# EAGLE board Main_DMB-4773 (EAGLE 6.5.0)
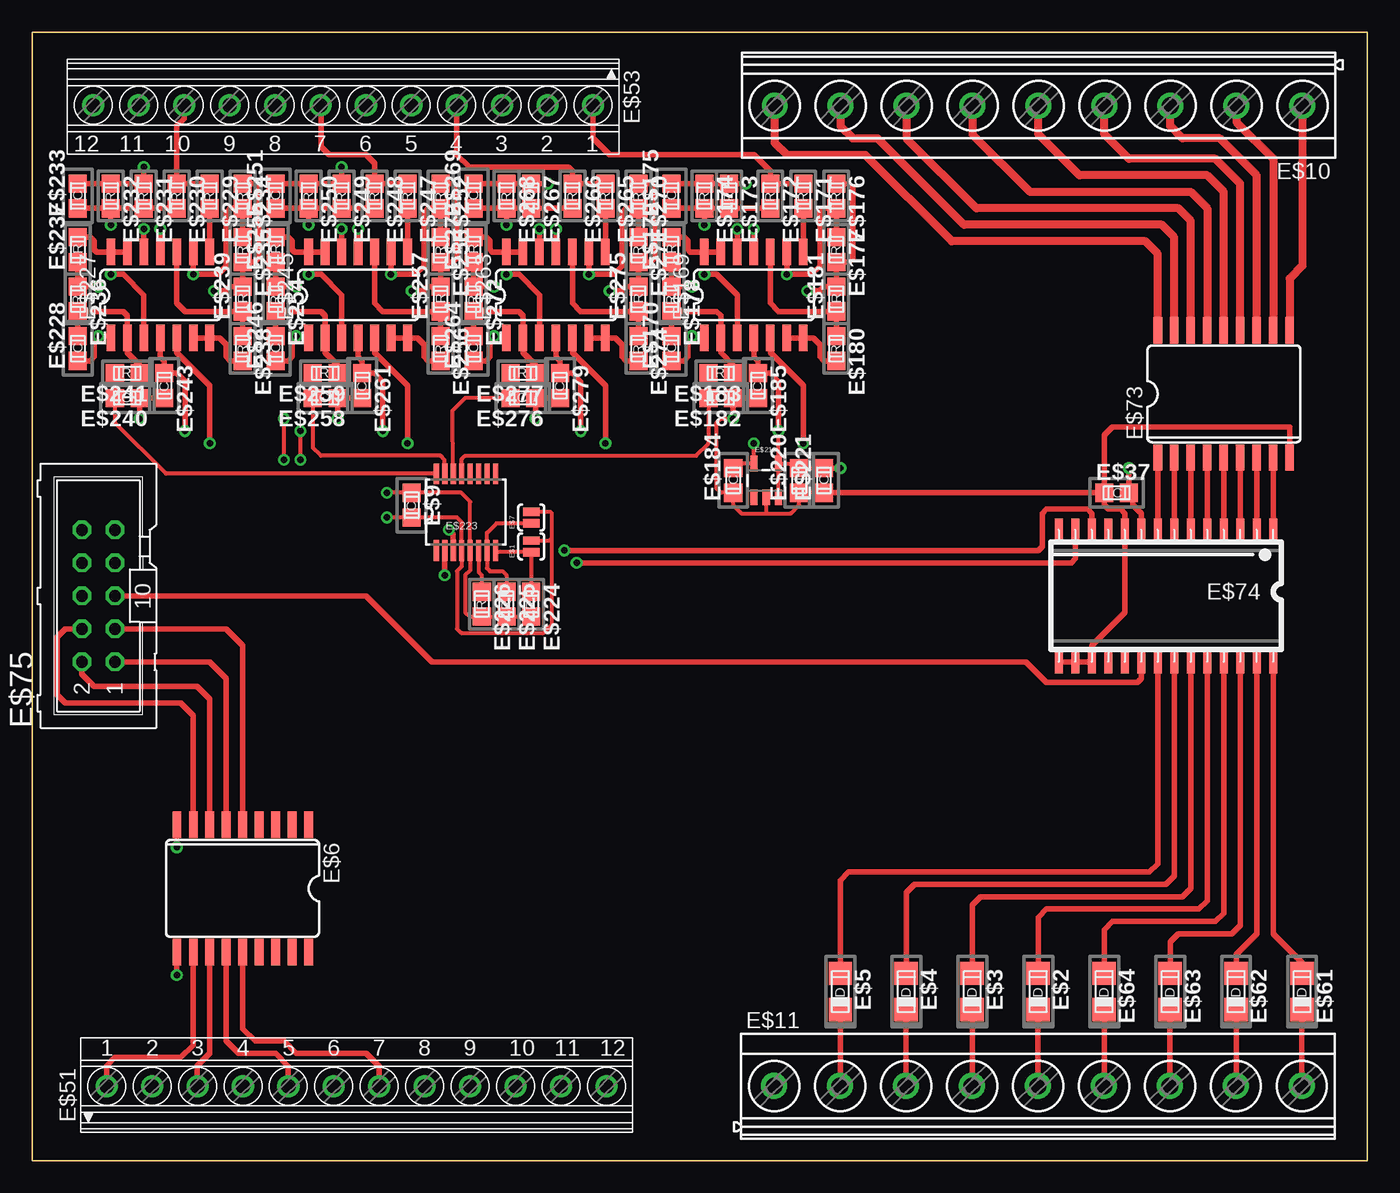
[diagram p0: board, top side]
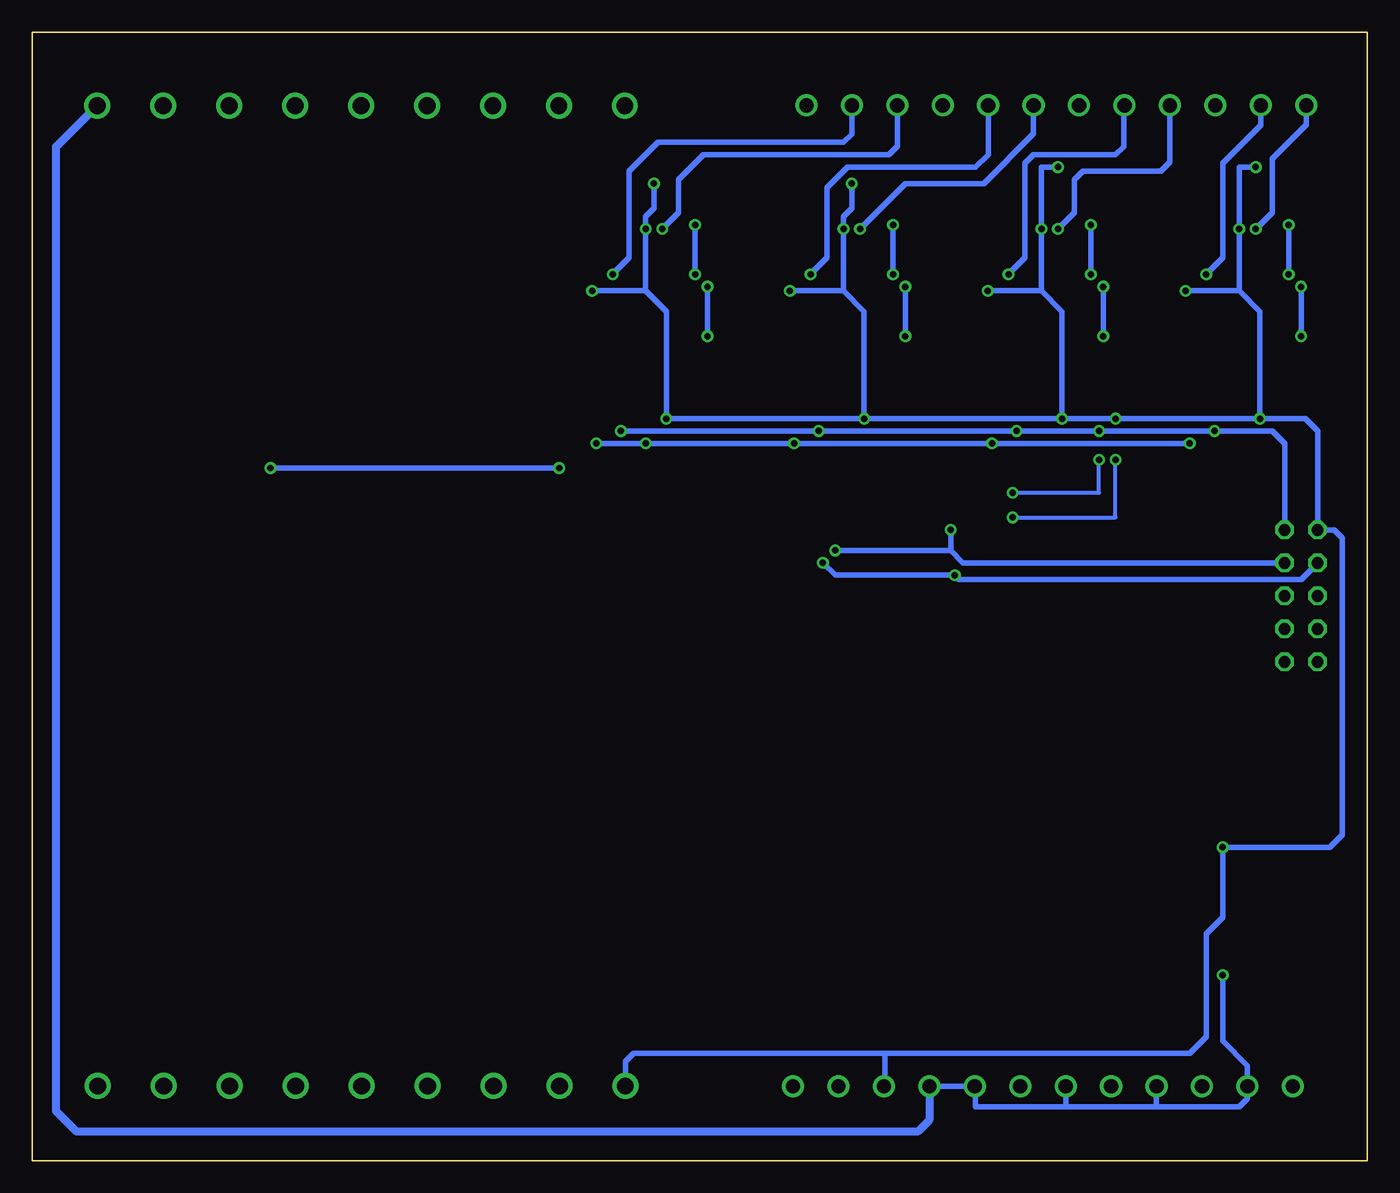
[diagram p1: board, bottom side, seen from below]

Size 102.79 x 86.89 mm. Coordinates in mm from the lower left corner, seen from the top.
Outline: 0,86.89 102.79,86.89 102.79,0 0,0 0,86.89
Copper layers (1*16): Top 0.035mm / dielectric 1.5mm / Bottom 0.035mm
Design rules "default *": minimum track width 10mil, minimum drill 24mil, track to track 7mil, track to pad 7mil, pad to pad 7mil, via to via 7mil, smd to smd 7mil, copper to edge 40mil, drill to drill 8mil, minimum pad ring 10mil, minimum via ring 8mil, stop-mask expansion 4mil, vias tented up to drill 0mil, thermal gap 10mil

## Footprints (pad centres in the part's own frame; a part is rotated, then mirrored left to right if it is on the bottom)
SJ_2S-NO = smd 0.635 x 1.27: 1 -0.45,0; 2 0.45,0
DMINIMELF = smd 1.8 x 1.8: A -1.4,0; C 1.4,0
SO18L = smd 0.66 x 2.032: 1 -0.635,-4.902; 2 0.635,-4.902; 3 1.905,-4.902; 4 3.175,-4.902; 5 4.445,-4.902; 6 5.715,-4.902; 7 6.985,-4.902; 8 8.255,-4.902; 9 9.525,-4.902; 10 9.525,4.902; 11 8.255,4.902; 12 6.985,4.902; 13 5.715,4.902; 14 4.445,4.902; 15 3.175,4.902; 16 1.905,4.902; 17 0.635,4.902; 18 -0.635,4.902
C0805 = smd 1.397 x 1.397: 1 -0.953,0; 2 0.953,0
MKDSN1,5/9-5,08 = drill 1.3 pad 2: 1 -20.341,0.025; 2 -15.261,0.025; 3 -10.181,0.025; 4 -5.101,0.025; 5 -0.021,0.025; 6 5.059,0.025; 7 10.139,0.025; 8 15.219,0.025; 9 20.299,0.025
175317 = drill 1.1 pad 1.7: 1 -13.973,0; 2 -10.473,0; 3 -6.973,0; 4 -3.473,0; 5 0.028,0; 6 3.527,0; 7 7.027,0; 8 10.527,0; 9 14.027,0; 19 17.527,0; 20 21.027,0; 21 24.527,0
SO28 = smd 0.635 x 1.778: 1 -8.255,-5.08; 2 -6.985,-5.08; 3 -5.715,-5.08; 4 -4.445,-5.08; 5 -3.175,-5.08; 6 -1.905,-5.08; 7 -0.635,-5.08; 8 0.635,-5.08; 9 1.905,-5.08; 10 3.175,-5.08; 11 4.445,-5.08; 12 5.715,-5.08; 13 6.985,-5.08; 14 8.255,-5.08; 15 8.255,5.08; 16 6.985,5.08; 17 5.715,5.08; 18 4.445,5.08; 19 3.175,5.08; 20 1.905,5.08; 21 0.635,5.08; 22 -0.635,5.08; 23 -1.905,5.08; 24 -3.175,5.08; 25 -4.445,5.08; 26 -5.715,5.08; 27 -6.985,5.08; 28 -8.255,5.08
ML10 = drill 0.914 octagon: 1 -5.08,-1.27; 2 -5.08,1.27; 3 -2.54,-1.27; 4 -2.54,1.27; 5 0,-1.27; 6 0,1.27; 7 2.54,-1.27; 8 2.54,1.27; 9 5.08,-1.27; 10 5.08,1.27
SOIC-14 = smd 0.66 x 2.032: 1 -4.445,-3.315; 2 -3.175,-3.315; 3 -1.905,-3.315; 4 -0.635,-3.315; 5 0.635,-3.315; 6 1.905,-3.315; 7 3.175,-3.315; 8 3.175,3.315; 9 1.905,3.315; 10 0.635,3.315; 11 -0.635,3.315; 12 -1.905,3.315; 13 -3.175,3.315; 14 -4.445,3.315
R0805 = smd 1.397 x 1.397: 1 -0.953,0; 2 0.953,0
SOT23-5 = smd 0.55 x 1.2: 1 -0.95,-1.3; 2 0,-1.3; 3 0.95,-1.3; 4 0.95,1.3; 5 -0.95,1.3
TSSOP16 = smd 0.4 x 1.6: 1 -2.225,-2.85; 2 -1.575,-2.85; 3 -0.925,-2.85; 4 -0.275,-2.85; 5 0.375,-2.85; 6 1.025,-2.85; 7 1.675,-2.85; 8 2.325,-2.85; 9 2.325,3.05; 10 1.675,3.05; 11 1.025,3.05; 12 0.375,3.05; 13 -0.275,3.05; 14 -0.925,3.05; 15 -1.575,3.05; 16 -2.225,3.05

## Placement (x,y rotation side)
E$1  [SJ_2S-NO]  38.42,47.31 90 top
E$2  [DMINIMELF]  77.47,13.02 270 top
E$3  [DMINIMELF]  72.39,13.02 270 top
E$4  [DMINIMELF]  67.31,13.02 270 top
E$5  [DMINIMELF]  62.23,13.02 270 top
E$6  ULN2803  [SO18L]  20.64,20.95 180 top
E$7  [SJ_2S-NO]  38.42,49.53 90 top
E$9  4.7n  [C0805]  29.21,50.48 270 top
E$10  [MKDSN1,5/9-5,08]  77.47,81.28 180 top
E$11  [MKDSN1,5/9-5,08]  77.47,5.71 0 top
E$37  0.1  [C0805]  83.5,51.44 0 top
E$51  [175317]  19.68,5.71 0 top
E$53  [175317]  29.21,81.28 180 top
E$61  [DMINIMELF]  97.79,13.02 270 top
E$62  [DMINIMELF]  92.71,13.02 270 top
E$63  [DMINIMELF]  87.63,13.02 270 top
E$64  [DMINIMELF]  82.55,13.02 270 top
E$73  ULN2803  [SO18L]  87.31,59.05 0 top
E$74  MCP23017  [SO28]  87.31,43.5 180 top
E$75  [ML10]  5.08,43.5 90 top
E$169  [SOIC-14]  56.2,66.67 0 top
E$170  0.1  [C0805]  49.21,62.55 90 top
E$171  1K  [R0805]  59.37,74.3 270 top
E$172  2K  [R0805]  56.83,74.3 270 top
E$173  2K  [R0805]  53.66,74.3 270 top
E$174  39.2K  [R0805]  51.75,74.3 270 top
E$175  0.1  [C0805]  49.21,74.3 90 top
E$176  1.91K  [R0805]  61.91,74.3 270 top
E$177  100  [R0805]  61.91,70.17 270 top
E$178  39.2K  [R0805]  49.21,66.36 270 top
E$179  1K  [R0805]  49.21,70.17 90 top
E$180  26.7K  [R0805]  61.91,62.55 270 top
E$181  1.1K  [R0805]  61.91,66.36 90 top
E$182  4.7n  [C0805]  53.02,58.74 180 top
E$183  51  [R0805]  53.02,60.64 180 top
E$184  0.1  [C0805]  53.98,52.39 90 top
E$185  0.1  [C0805]  55.88,59.69 270 top
E$219  [SOT23-5]  56.52,52.39 0 top
E$220  0.1  [C0805]  59.05,52.39 90 top
E$221  0.1  [C0805]  60.96,52.39 90 top
E$223  AD5316R  [TSSOP16]  33.34,49.85 0 top
E$224  51  [R0805]  38.42,42.86 270 top
E$225  51  [R0805]  36.51,42.86 270 top
E$226  51  [R0805]  34.61,42.86 270 top
E$227  [SOIC-14]  10.48,66.67 0 top
E$228  0.1  [C0805]  3.49,62.55 90 top
E$229  1K  [R0805]  13.65,74.3 270 top
E$230  2K  [R0805]  11.11,74.3 270 top
E$231  2K  [R0805]  8.57,74.3 270 top
E$232  39.2K  [R0805]  6.03,74.3 270 top
E$233  0.1  [C0805]  3.49,74.3 90 top
E$234  1.91K  [R0805]  16.19,74.3 270 top
E$235  100  [R0805]  16.19,70.17 270 top
E$236  39.2K  [R0805]  3.49,66.36 270 top
E$237  1K  [R0805]  3.49,70.17 90 top
E$238  26.7K  [R0805]  16.19,62.55 270 top
E$239  1.1K  [R0805]  16.19,66.36 90 top
E$240  4.7n  [C0805]  7.3,58.74 180 top
E$241  51  [R0805]  7.3,60.64 180 top
E$243  0.1  [C0805]  10.16,59.69 270 top
E$245  [SOIC-14]  25.72,66.67 0 top
E$246  0.1  [C0805]  18.73,62.55 90 top
E$247  1K  [R0805]  28.89,74.3 270 top
E$248  2K  [R0805]  26.35,74.3 270 top
E$249  2K  [R0805]  23.81,74.3 270 top
E$250  39.2K  [R0805]  21.27,74.3 270 top
E$251  0.1  [C0805]  18.73,74.3 90 top
E$252  1.91K  [R0805]  31.43,74.3 270 top
E$253  100  [R0805]  31.43,70.17 270 top
E$254  39.2K  [R0805]  18.73,66.36 270 top
E$255  1K  [R0805]  18.73,70.17 90 top
E$256  26.7K  [R0805]  31.43,62.55 270 top
E$257  1.1K  [R0805]  31.43,66.36 90 top
E$258  4.7n  [C0805]  22.54,58.74 180 top
E$259  51  [R0805]  22.54,60.64 180 top
E$261  0.1  [C0805]  25.4,59.69 270 top
E$263  [SOIC-14]  40.96,66.67 0 top
E$264  0.1  [C0805]  33.97,62.55 90 top
E$265  1K  [R0805]  44.13,74.3 270 top
E$266  2K  [R0805]  41.59,74.3 270 top
E$267  2K  [R0805]  38.42,74.3 270 top
E$268  39.2K  [R0805]  36.51,74.3 270 top
E$269  0.1  [C0805]  33.97,74.3 90 top
E$270  1.91K  [R0805]  46.67,74.3 270 top
E$271  100  [R0805]  46.67,70.17 270 top
E$272  39.2K  [R0805]  33.97,66.36 270 top
E$273  1K  [R0805]  33.97,70.17 90 top
E$274  26.7K  [R0805]  46.67,62.55 270 top
E$275  1.1K  [R0805]  46.67,66.36 90 top
E$276  4.7n  [C0805]  37.78,58.74 180 top
E$277  51  [R0805]  37.78,60.64 180 top
E$279  0.1  [C0805]  40.64,59.69 270 top

## Library data of the parts
E$1 E$7 = SparkFun-Capacitors
E$2-E$5 E$61-E$64 = diodes
E$6 E$73 = SparkFun-PowerIC
E$9 E$37 E$170-E$185 E$220 E$221 E$224-E$226 E$228-E$241 E$243 E$246-E$259 E$261 E$264-E$277 E$279 = divers
E$10 E$11 = con-phoenix-508
E$51 E$53 = con-phoenix-350
E$74 = ic
E$75 = con-harting-ml
E$169 E$219 E$227 E$245 E$263 = SparkFun-DigitalIC
E$223 = SparkFun-AnalogIC

## Nets
GND: E$1.2 E$6.9 E$7.2 E$9.2 E$11.1 E$37.1 E$51.19 E$73.9 E$74.10 E$74.15 E$74.16 E$74.17 E$75.10 E$169.11 E$173.1 E$174.1 E$175.2 E$176.1 E$177.2 E$181.2 E$182.1 E$184.1 E$185.2 E$219.2 E$220.1 E$221.1 E$223.4 E$227.11 E$231.1 E$232.1 E$233.2 E$234.1 E$235.2 E$239.2 E$240.1 E$243.2 E$245.11 E$249.1 E$250.1 E$251.2 E$252.1 E$253.2 E$257.2 E$258.1 E$261.2 E$263.11 E$267.1 E$268.1 E$269.2 E$270.1 E$271.2 E$275.2 E$276.1 E$279.2
S$8: E$74.20 E$75.5
S$11: E$53.1 E$171.1 E$172.1
S$14: E$5.C E$11.2
S$15: E$4.C E$11.3
S$16: E$3.C E$11.4
S$17: E$2.C E$11.5
S$18: E$61.A E$74.28
S$19: E$62.A E$74.27
S$20: E$63.A E$74.26
S$21: E$64.A E$74.25
S$22: E$2.A E$74.24
S$23: E$3.A E$74.23
S$24: E$4.A E$74.22
S$25: E$5.A E$74.21
S$26: E$6.11 E$51.1
S$27: E$6.12 E$51.3
S$28: E$6.13 E$51.5
S$29: E$6.14 E$51.7
S$34: E$1.1 E$223.8 E$224.1
S$35: E$6.6 E$75.1
S$36: E$6.5 E$75.3
S$37: E$6.7 E$75.2
S$38: E$6.8 E$75.4
S$39: E$10.9 E$73.18
S$40: E$10.8 E$73.17
S$41: E$10.7 E$73.16
S$42: E$10.6 E$73.15
S$43: E$10.5 E$73.14
S$44: E$10.4 E$73.13
S$45: E$10.3 E$73.12
S$46: E$10.2 E$73.11
S$48: E$11.6 E$64.C
S$49: E$11.7 E$63.C
S$50: E$11.8 E$62.C
S$55: E$11.9 E$61.C
S$86: E$73.1 E$74.8
S$94: E$73.8 E$74.1
S$95: E$73.7 E$74.2
S$96: E$73.6 E$74.3
S$97: E$73.5 E$74.4
S$98: E$73.4 E$74.5
S$99: E$169.8 E$171.2
S$100: E$73.3 E$74.6
S$101: E$73.2 E$74.7
S$102: E$169.6 E$169.7 E$180.2
S$105: E$53.2 E$169.9 E$176.2 E$177.1
S$108: E$169.1 E$170.1 E$178.1 E$179.1
S$114: E$169.2 E$170.2 E$178.2 E$183.1
S$120: E$169.13 E$169.14 E$179.2
S$126: E$169.10 E$180.1 E$181.1
S$132: E$169.3 E$172.2 E$173.2 E$174.2 E$175.1
S$133: E$53.3 E$169.12
S$134: E$182.2 E$183.2 E$223.13
S$151: E$169.5 E$184.2 E$219.5 E$227.5 E$245.5 E$263.5
S$195: E$53.19 E$229.1 E$230.1
S$196: E$227.8 E$229.2
S$197: E$227.6 E$227.7 E$238.2
S$198: E$53.20 E$227.9 E$234.2 E$235.1
S$199: E$227.1 E$228.1 E$236.1 E$237.1
S$200: E$227.2 E$228.2 E$236.2 E$241.1
S$201: E$227.13 E$227.14 E$237.2
S$202: E$227.10 E$238.1 E$239.1
S$204: E$227.3 E$230.2 E$231.2 E$232.2 E$233.1
S$205: E$53.21 E$227.12
S$206: E$223.16 E$240.2 E$241.2
S$209: E$53.7 E$247.1 E$248.1
S$210: E$245.8 E$247.2
S$211: E$245.6 E$245.7 E$256.2
S$212: E$53.8 E$245.9 E$252.2 E$253.1
S$213: E$245.1 E$246.1 E$254.1 E$255.1
S$214: E$245.2 E$246.2 E$254.2 E$259.1
S$215: E$245.13 E$245.14 E$255.2
S$216: E$245.10 E$256.1 E$257.1
S$218: E$245.3 E$248.2 E$249.2 E$250.2 E$251.1
S$219: E$53.9 E$245.12
S$220: E$223.15 E$258.2 E$259.2
S$223: E$53.4 E$265.1 E$266.1
S$224: E$263.8 E$265.2
S$225: E$263.6 E$263.7 E$274.2
S$226: E$53.5 E$263.9 E$270.2 E$271.1
S$227: E$263.1 E$264.1 E$272.1 E$273.1
S$228: E$263.2 E$264.2 E$272.2 E$277.1
S$229: E$263.13 E$263.14 E$273.2
S$230: E$263.10 E$274.1 E$275.1
S$231: E$223.6 E$226.1
S$232: E$263.3 E$266.2 E$267.2 E$268.2 E$269.1
S$233: E$53.6 E$263.12
S$234: E$223.14 E$276.2 E$277.2
S$235: E$7.1 E$223.7 E$225.1
SCL: E$74.12 E$75.7 E$223.3
SDA: E$74.13 E$75.8 E$223.2
VCC: E$9.1 E$37.2 E$74.9 E$75.9 E$169.4 E$185.1 E$219.3 E$219.4 E$220.2 E$221.2 E$223.5 E$224.2 E$225.2 E$226.2 E$227.4 E$243.1 E$245.4 E$261.1 E$263.4 E$279.1
VCOM: E$6.10 E$10.1 E$51.2 E$51.4 E$51.6 E$51.8 E$51.9 E$73.10

## Tracks (layer width: path | path; a pad name or v marks a point on that pad's centre or on a via)
GND  (via drill 0.5)
  Top 0.305: E$221.1 E$220.1 | E$219.2 56.52,49.85 | 56.52,49.85 58.42,49.85 59.05,50.48 E$220.1 | E$220.1 | 56.52,49.85 54.61,49.85 53.98,50.48 E$184.1 53.02,51.44 52.7,51.75 52.7,56.83 53.02,57.15 v53.98,57.15 | v27.3,49.53 E$9.2 32.7,49.53 33.06,49.17 E$223.4 33.06,45.76 32.7,45.4 32.7,40.96 33.02,40.64 39.37,40.64 40.01,41.27 40.01,47.94 | v19.37,53.98 v19.37,57.15 | 40.01,47.94 40.01,49.85 39.87,49.98 E$7.2 | E$1.2 39.82,47.76 40.01,47.94
  Top 0.406: E$251.2 E$250.1 E$249.1 v23.81,76.52 | v29.21,66.99 30.16,66.99 30.48,67.31 E$257.2 E$253.2 32.38,69.22 32.7,69.53 32.7,74.93 32.38,75.25 E$252.1 | v23.81,76.52 | E$245.11 v25.08,71.75 | v23.5,57.15 E$258.1 E$261.2 | E$269.2 E$268.1 E$267.1 39.05,75.25 v39.69,75.25 | v44.45,66.99 45.4,66.99 45.72,67.31 E$275.2 E$271.2 47.62,69.22 47.94,69.53 47.94,74.93 47.62,75.25 E$270.1 | E$263.11 v40.32,71.75 | v38.73,57.15 E$276.1 E$279.2 | E$175.2 E$174.1 E$173.1 54.29,75.25 v54.93,75.25 | v59.69,66.99 60.64,66.99 60.96,67.31 E$181.2 E$177.2 62.87,69.22 63.18,69.53 63.18,74.93 62.87,75.25 E$176.1 | E$169.11 v55.56,71.75 | v53.98,57.15 E$182.1 E$185.2 | E$233.2 E$232.1 E$231.1 v8.57,76.52 | v13.97,66.99 14.92,66.99 15.24,67.31 E$239.2 E$235.2 17.14,69.22 17.46,69.53 17.46,74.93 17.14,75.25 E$234.1 | v8.57,76.52 | E$227.11 v9.84,71.75 | v8.26,57.15 E$240.1 E$243.2 | E$73.9 96.84,56.52 83.19,56.52 82.55,55.88 E$37.1 | E$37.1 | E$37.1 82.55,50.48 82.87,50.16 83.82,50.16 84.14,49.85 E$74.10 84.14,42.23 81.6,39.69 E$74.17 E$74.16 E$74.15 | E$37.1 E$221.1 | E$221.1 | E$6.9 v11.11,24.13
  Bottom 0.305: v27.3,49.53 19.37,49.53 v19.37,53.98
  Bottom 0.406: v23.81,76.52 25.08,76.52 v25.08,71.75 25.08,66.99 | 25.08,66.99 v29.21,66.99 | v23.5,57.15 23.5,65.41 25.08,66.99 | v39.69,75.25 39.69,73.34 40.32,72.71 v40.32,71.75 40.32,66.99 | 40.32,66.99 v44.45,66.99 | v38.73,57.15 38.73,65.41 40.32,66.99 | v23.5,57.15 v38.73,57.15 | v54.93,75.25 54.93,73.34 55.56,72.71 v55.56,71.75 55.56,66.99 | 55.56,66.99 v59.69,66.99 | 55.56,66.99 53.98,65.41 v53.98,57.15 v38.73,57.15 | v8.57,76.52 9.84,76.52 v9.84,71.75 9.84,66.99 | 9.84,66.99 v13.97,66.99 | v8.26,57.15 8.26,65.41 9.84,66.99 | v23.5,57.15 v19.37,57.15 v8.26,57.15 | v8.26,57.15 4.76,57.15 3.81,56.2 E$75.10 2.54,48.58 1.91,47.94 1.91,25.08 2.86,24.13 v11.11,24.13 11.11,18.73 12.38,17.46 12.38,9.53 13.65,8.26 37.15,8.26 | 37.15,8.26 37.15,5.78 E$51.19 | E$11.1 57.13,7.64 56.52,8.26 37.15,8.26
S$8
  Top 0.406: E$75.5 25.72,43.5 30.8,38.42 76.52,38.42 78.11,36.83 85.09,36.83 85.41,37.15 E$74.20
S$11
  Top 0.406: E$171.1 | E$171.1 | E$171.1 E$172.1 56.83,76.2 55.56,77.47 44.45,77.47 43.18,78.74 E$53.1
S$14
  Top 0.406: 62.26,11.59 E$5.C 62.23,5.76 E$11.2
S$15
  Top 0.406: 67.34,11.58 E$4.C 67.29,11.6 E$11.3
S$16
  Top 0.406: 72.43,11.57 E$3.C 72.39,5.76 E$11.4
S$17
  Top 0.406: 77.52,11.57 E$2.C 77.45,11.6 E$11.5
S$18
  Top 0.406: E$74.28 95.57,17.46 97.79,15.24 E$61.A
S$19
  Top 0.406: E$62.A 92.71,15.88 94.3,17.46 E$74.27
S$20
  Top 0.406: E$63.A 87.63,16.83 88.27,17.46 92.39,17.46 93.03,18.1 E$74.26
S$21
  Top 0.406: E$64.A 82.55,17.78 83.19,18.41 91.12,18.41 91.76,19.05 E$74.25
S$22
  Top 0.406: E$2.A 77.47,18.73 78.11,19.37 89.85,19.37 90.49,20 E$74.24
S$23
  Top 0.406: E$74.23 89.22,20.95 88.58,20.32 73.03,20.32 72.39,19.68 E$3.A
S$24
  Top 0.406: E$4.A 67.31,20.64 67.94,21.27 87.31,21.27 87.95,21.91 E$74.22
S$25
  Top 0.406: E$5.A 62.23,21.59 62.87,22.23 86.04,22.23 86.68,22.86 E$74.21
S$26
  Top 0.406: E$51.1 5.71,7.3 6.35,7.94 11.43,7.94 12.38,8.89 E$6.11
S$27
  Top 0.406: E$6.12 13.65,8.26 12.7,7.3 12.7,5.73 E$51.3
S$28
  Top 0.406: E$51.5 19.71,7.28 18.73,8.26 15.88,8.26 14.92,9.21 E$6.13
S$29
  Top 0.406: E$51.7 26.71,7.26 25.72,8.26 20.32,8.26 19.37,9.21 17.14,9.21 16.19,10.16 E$6.14
S$34
  Top 0.305: E$223.8 35.8,46.86 E$1.1 E$224.1
  Top 0.406: E$224.1
S$35
  Top 0.406: E$75.1 13.65,38.42 14.92,37.15 E$6.6
S$36
  Top 0.406: E$6.5 16.19,39.69 14.92,40.96 E$75.3
S$37
  Top 0.406: E$75.2 3.81,37.47 4.76,36.51 12.7,36.51 13.65,35.56 E$6.7
S$38
  Top 0.406: E$6.8 12.38,34.29 11.43,35.24 2.54,35.24 1.91,35.88 1.91,40.32 2.54,40.96 E$75.4
S$39
  Top 0.61: E$10.9 57.17,78.4 58.1,77.47 64.14,77.47 70.8,70.8 85.72,70.8 86.68,69.85 E$73.18
S$40
  Top 0.61: E$10.8 62.25,79.67 63.18,78.74 65.09,78.74 71.75,72.07 87,72.07 87.95,71.12 E$73.17
S$41
  Top 0.61: E$10.7 67.33,78.72 72.71,73.34 88.27,73.34 89.22,72.39 E$73.16
S$42
  Top 0.61: E$10.6 72.41,79.04 76.83,74.61 89.22,74.61 90.49,73.34 E$73.15
S$43
  Top 0.61: E$73.14 91.76,74.61 90.49,75.88 80.64,75.88 77.47,79.06 77.47,81.23 E$10.5
S$44
  Top 0.61: E$73.13 93.03,75.25 91.12,77.15 84.45,77.15 82.55,79.06 82.55,81.23 E$10.4
S$45
  Top 0.61: E$73.12 94.3,75.88 91.44,78.74 88.58,78.74 87.63,79.69 87.63,81.23 E$10.3
S$46
  Top 0.61: E$10.2 92.73,79.99 95.57,77.15 E$73.11
S$48
  Top 0.406: E$64.C 82.55,5.76 E$11.6
S$49
  Top 0.406: E$11.7 87.61,11.6 E$63.C
S$50
  Top 0.406: E$62.C 92.71,5.76 E$11.8
S$55
  Top 0.406: E$11.9 97.77,11.6 E$61.C
S$86
  Top 0.406: E$73.1 E$74.8
S$94
  Top 0.406: E$74.1 E$73.8
S$95
  Top 0.406: E$73.7 E$74.2
S$96
  Top 0.406: E$74.3 E$73.6
S$97
  Top 0.406: E$73.5 E$74.4
S$98
  Top 0.406: E$74.5 E$73.4
S$99
  Top 0.406: E$171.2 E$169.8
S$100
  Top 0.406: E$73.3 E$74.6
S$101
  Top 0.406: E$74.7 E$73.2
S$102
  Top 0.406: E$169.6 E$169.7 60.15,63.36 60.64,62.87 60.64,61.91 60.96,61.59 E$180.2
S$105  (via drill 0.5)
  Top 0.406: E$169.9 v58.1,68.26 60.01,68.26 60.64,68.9 60.64,73.03 60.96,73.34 E$176.2 E$177.1
  Bottom 0.406: E$53.2 39.68,79.06 40.32,78.42 54.61,78.42 56.83,76.2 56.83,69.53 v58.1,68.26
S$108  (via drill 0.5)
  Top 0.406: E$169.1 51.61,63.5 v50.8,63.5 50.48,63.18 50.48,61.91 50.16,61.59 E$170.1 | E$179.1 E$178.1 v50.8,67.31
  Bottom 0.406: v50.8,67.31 v50.8,63.5
S$114
  Top 0.406: E$170.2 E$178.2 52.7,65.41 53.02,65.09 E$169.2 53.02,62.23 53.98,61.28 E$183.1
S$120
  Top 0.406: E$179.2 50.16,71.12 50.48,70.8 50.48,70.17 50.66,69.99 E$169.14 | E$169.13 E$169.14 | E$169.14 51.75,70.8
S$126
  Top 0.406: E$180.1 E$181.1 57.47,65.41 56.83,66.04 E$169.10
S$132  (via drill 0.5)
  Top 0.406: E$175.1 E$174.2 | E$169.3 54.29,66.67 52.7,68.26 v51.75,68.26 | v51.75,72.07 E$174.2 | E$174.2 E$173.2 E$172.2
  Bottom 0.406: v51.75,68.26 v51.75,72.07
S$133  (via drill 0.5)
  Top 0.406: E$169.12 v54.29,71.75
  Bottom 0.406: v54.29,71.75 53.02,73.03 53.02,75.56 51.12,77.47 36.83,77.47 36.18,78.12 E$53.3
S$134
  Top 0.305: E$182.2 52.07,55.24 51.12,54.29 33.34,54.29 33.06,54.02 E$223.13
  Top 0.406: E$183.2 E$182.2
S$151  (via drill 0.5)
  Top 0.305: E$184.2 54.32,53.69 E$219.5 v55.56,55.24
  Top 0.406: v59.37,55.24 59.37,59.69 56.83,62.23 E$169.5 | v44.13,55.24 44.13,59.69 41.59,62.23 E$263.5 | v28.89,55.24 28.89,59.69 26.35,62.23 E$245.5 | v13.65,55.24 13.65,59.69 11.11,62.23 E$227.5
  Bottom 0.305: 14.61,55.24 v13.65,55.24
  Bottom 0.406: v59.37,55.24 v55.56,55.24 v44.13,55.24 v28.89,55.24 v13.65,55.24
S$195
  Top 0.406: E$229.1 | E$229.1 E$230.1 11.11,79.69 11.68,80.26 E$53.19 | E$229.1
S$196
  Top 0.406: E$229.2 E$227.8
S$197
  Top 0.406: E$227.6 E$227.7 14.43,63.36 14.92,62.87 14.92,61.91 15.24,61.59 E$238.2
S$198  (via drill 0.5)
  Top 0.406: E$227.9 v12.38,68.26 14.29,68.26 14.92,68.9 14.92,73.03 15.24,73.34 E$234.2 E$235.1
  Bottom 0.406: v12.38,68.26 11.11,69.53 11.11,76.83 8.18,79.77 E$53.20
S$199  (via drill 0.5)
  Top 0.406: E$227.1 5.89,63.5 v5.08,63.5 4.76,63.18 4.76,61.91 4.45,61.59 E$228.1 | E$237.1 E$236.1 v5.08,67.31
  Bottom 0.406: v5.08,67.31 v5.08,63.5
S$200
  Top 0.406: E$228.2 E$236.2 6.99,65.41 7.3,65.09 E$227.2 7.3,62.23 8.26,61.28 E$241.1
S$201
  Top 0.406: E$237.2 4.45,71.12 4.76,70.8 4.76,70.17 4.94,69.99 E$227.14 | E$227.13 E$227.14 | E$227.14 6.03,70.8
S$202
  Top 0.406: E$238.1 E$239.1 11.75,65.41 11.11,66.04 E$227.10
S$204  (via drill 0.5)
  Top 0.406: E$233.1 E$232.2 | E$227.3 8.57,66.67 6.99,68.26 v6.03,68.26 | v6.03,72.07 E$232.2 | E$232.2 E$231.2 E$230.2
  Bottom 0.406: v6.03,68.26 v6.03,72.07
S$205  (via drill 0.5)
  Top 0.406: E$227.12 v8.57,71.75
  Bottom 0.406: v8.57,71.75 7.3,73.03 7.3,77.15 4.68,79.77 E$53.21
S$206
  Top 0.305: E$240.2 6.35,56.83 10.29,52.9 E$223.16
  Top 0.406: E$241.2 E$240.2
S$209
  Top 0.406: E$247.1 | E$247.1 E$248.1 | E$247.1 | E$53.7 22.18,81 22.23,80.96 22.23,78.11 22.86,77.47 25.72,77.47 26.35,76.83 E$248.1 | E$248.1
S$210
  Top 0.406: E$247.2 E$245.8
S$211
  Top 0.406: E$245.6 E$245.7 29.67,63.36 30.16,62.87 30.16,61.91 30.48,61.59 E$256.2
S$212  (via drill 0.5)
  Top 0.406: E$245.9 v27.62,68.26 29.53,68.26 30.16,68.9 30.16,73.03 30.48,73.34 E$252.2 E$253.1
  Bottom 0.406: E$53.8 18.68,80.69 18.73,80.64 18.73,78.11 19.37,77.47 25.72,77.47 26.35,76.83 26.35,69.53 v27.62,68.26
S$213  (via drill 0.5)
  Top 0.406: E$245.1 21.13,63.5 v20.32,63.5 20,63.18 20,61.91 19.68,61.59 E$246.1 | E$255.1 E$254.1 v20.32,67.31
  Bottom 0.406: v20.32,67.31 v20.32,63.5
S$214
  Top 0.406: E$246.2 E$254.2 22.23,65.41 22.54,65.09 E$245.2 22.54,62.23 23.5,61.28 E$259.1
S$215
  Top 0.406: E$255.2 19.68,71.12 20,70.8 20,70.17 20.18,69.99 E$245.14 | E$245.13 E$245.14 | E$245.14 21.27,70.8
S$216
  Top 0.406: E$256.1 E$257.1 26.99,65.41 26.35,66.04 E$245.10
S$218  (via drill 0.5)
  Top 0.406: E$251.1 E$250.2 | E$245.3 23.81,66.67 22.23,68.26 v21.27,68.26 | v21.27,72.07 E$250.2 | E$250.2 E$249.2 E$248.2
  Bottom 0.406: v21.27,68.26 v21.27,72.07
S$219  (via drill 0.5)
  Top 0.406: E$245.12 v23.81,71.75
  Bottom 0.406: v23.81,71.75 22.54,73.03 22.54,75.56 21.91,76.2 15.88,76.2 15.18,76.89 E$53.9
S$220
  Top 0.305: E$258.2 21.59,54.93 22.23,54.29 31.43,54.29 31.74,53.96 E$223.15
  Top 0.406: E$259.2 E$258.2
S$223
  Top 0.406: E$265.1 | E$265.1 E$266.1 41.59,76.2 41.27,76.52 33.66,76.52 32.68,77.49 E$53.4 | E$265.1
S$224
  Top 0.406: E$265.2 E$263.8
S$225
  Top 0.406: E$263.6 E$263.7 44.91,63.36 45.4,62.87 45.4,61.91 45.72,61.59 E$274.2
S$226  (via drill 0.5)
  Top 0.406: E$263.9 v42.86,68.26 44.77,68.26 45.4,68.9 45.4,73.03 45.72,73.34 E$270.2 E$271.1
  Bottom 0.406: v42.86,68.26 41.59,69.53 41.59,74.93 40.01,76.52 30.16,76.52 29.18,77.5 E$53.5
S$227  (via drill 0.5)
  Top 0.406: E$263.1 36.37,63.5 v35.56,63.5 35.24,63.18 35.24,61.91 34.92,61.59 E$264.1 | E$273.1 E$272.1 v35.56,67.31
  Bottom 0.406: v35.56,67.31 v35.56,63.5
S$228
  Top 0.406: E$264.2 E$272.2 37.47,65.41 37.78,65.09 E$263.2 37.78,62.23 38.73,61.28 E$277.1
S$229
  Top 0.406: E$273.2 34.92,71.12 35.24,70.8 35.24,70.17 35.42,69.99 E$263.14 | E$263.13 E$263.14 | E$263.14 36.51,70.8
S$230
  Top 0.406: E$274.1 E$275.1 42.23,65.41 41.59,66.04 E$263.10
S$231
  Top 0.305: E$223.6 34.36,45.33 34.61,45.09 E$226.1
S$232  (via drill 0.5)
  Top 0.406: E$269.1 E$268.2 | E$263.3 39.05,66.67 37.47,68.26 v36.51,68.26 | v36.51,72.07 E$268.2 | E$268.2 E$267.2 E$266.2
  Bottom 0.406: v36.51,68.26 v36.51,72.07
S$233  (via drill 0.5)
  Top 0.406: E$263.12 v39.05,71.75
  Bottom 0.406: E$53.6 25.68,79.09 29.53,75.25 35.56,75.25 v39.05,71.75
S$234
  Top 0.305: E$276.2 33.34,58.74 32.36,57.76 E$223.14
  Top 0.406: E$277.2 E$276.2
S$235
  Top 0.305: E$225.1 36.51,45.09 36.2,45.4 35.24,45.4 35.01,45.63 E$223.7 35.01,48.35 35.74,49.08 E$7.1
SCL  (via drill 0.5)
  Top 0.406: v32.07,48.58 32.41,48.23 E$223.3 | E$74.12 81.6,49.85 81.28,50.16 78.11,50.16 77.79,49.85 77.79,47.31 77.47,46.99 v40.96,46.99
  Bottom 0.406: E$75.7 31.11,46.04 32.07,46.99 | 32.07,46.99 v32.07,48.58 | v40.96,46.99 32.07,46.99
SDA  (via drill 0.5)
  Top 0.406: E$223.2 31.76,46.02 v31.75,45.09 | E$74.13 80.33,46.35 80.01,46.04 v41.91,46.04
  Bottom 0.406: E$75.8 5.08,44.77 31.43,44.77 v31.75,45.09 40.96,45.09 v41.91,46.04
VCC  (via drill 0.5)
  Top 0.305: v27.3,51.44 E$9.1 33.02,51.44 33.71,50.74 E$223.5 33.71,45.46 33.34,45.09 33.34,42.23 33.66,41.91 E$226.2 E$225.2 E$224.2 | v20.64,53.98 v20.64,56.2 | E$219.3 E$219.4 | E$219.4 v57.47,56.2 | E$219.4 58.71,53.69 E$220.2 E$221.2
  Top 0.406: E$227.4 9.84,61.91 10.16,61.59 E$243.1 11.11,60.64 11.75,60.01 v11.75,56.2 | E$245.4 25.08,61.91 25.4,61.59 E$261.1 26.35,60.64 26.99,60.01 v26.99,56.2 | E$169.4 55.56,61.91 55.88,61.59 E$185.1 56.83,60.64 57.47,60.01 v57.47,56.2 | E$263.4 40.32,61.91 40.64,61.59 E$279.1 41.59,60.64 42.23,60.01 v42.23,56.2 | E$74.9 85.41,49.85 84.77,50.48 84.77,51.12 E$37.2 v84.45,53.34 | v62.23,53.34 E$221.2
  Bottom 0.305: v27.3,51.44 20.64,51.44 v20.64,53.98
  Bottom 0.406: v57.47,56.2 v42.23,56.2 v26.99,56.2 v20.64,56.2 v11.75,56.2 7.3,56.2 6.35,55.24 E$75.9 | v84.45,53.34 v62.23,53.34
VCOM  (via drill 0.5)
  Top 0.406: v11.11,14.29 E$6.10
  Top 0.61: E$10.1 97.81,68.92 96.84,67.94 E$73.10
  Bottom 0.406: 16.19,4.13 9.84,4.13 9.21,4.76 E$51.2 9.21,7.31 11.11,9.21 v11.11,14.29 | 16.19,4.13 23.18,4.13 | 23.18,4.13 30.16,4.13 30.16,5.67 E$51.8 E$51.9 | E$51.6 23.21,4.16 23.18,4.13 | E$51.4 16.21,4.15 16.19,4.13
  Bottom 0.61: E$51.9 33.71,3.12 34.61,2.22 99.38,2.22 100.97,3.81 100.97,78.1 E$10.1

## Text on the board
tDocu: Outputs Open Collector | RTD1 | RTD2 | RTD3 | RTD4 | 8 | 7 | 6 | 5 | 4 | 3 | 2 | 1 | +V Com | PWM1 | PWM2 | PWM3 | PWM4 | +V Com | GND | GND | 1 | 2 | 3 | 4 | 5 | 6 | 7 | 8